# EAGLE board eTapper1main27 (EAGLE 8.3.2)
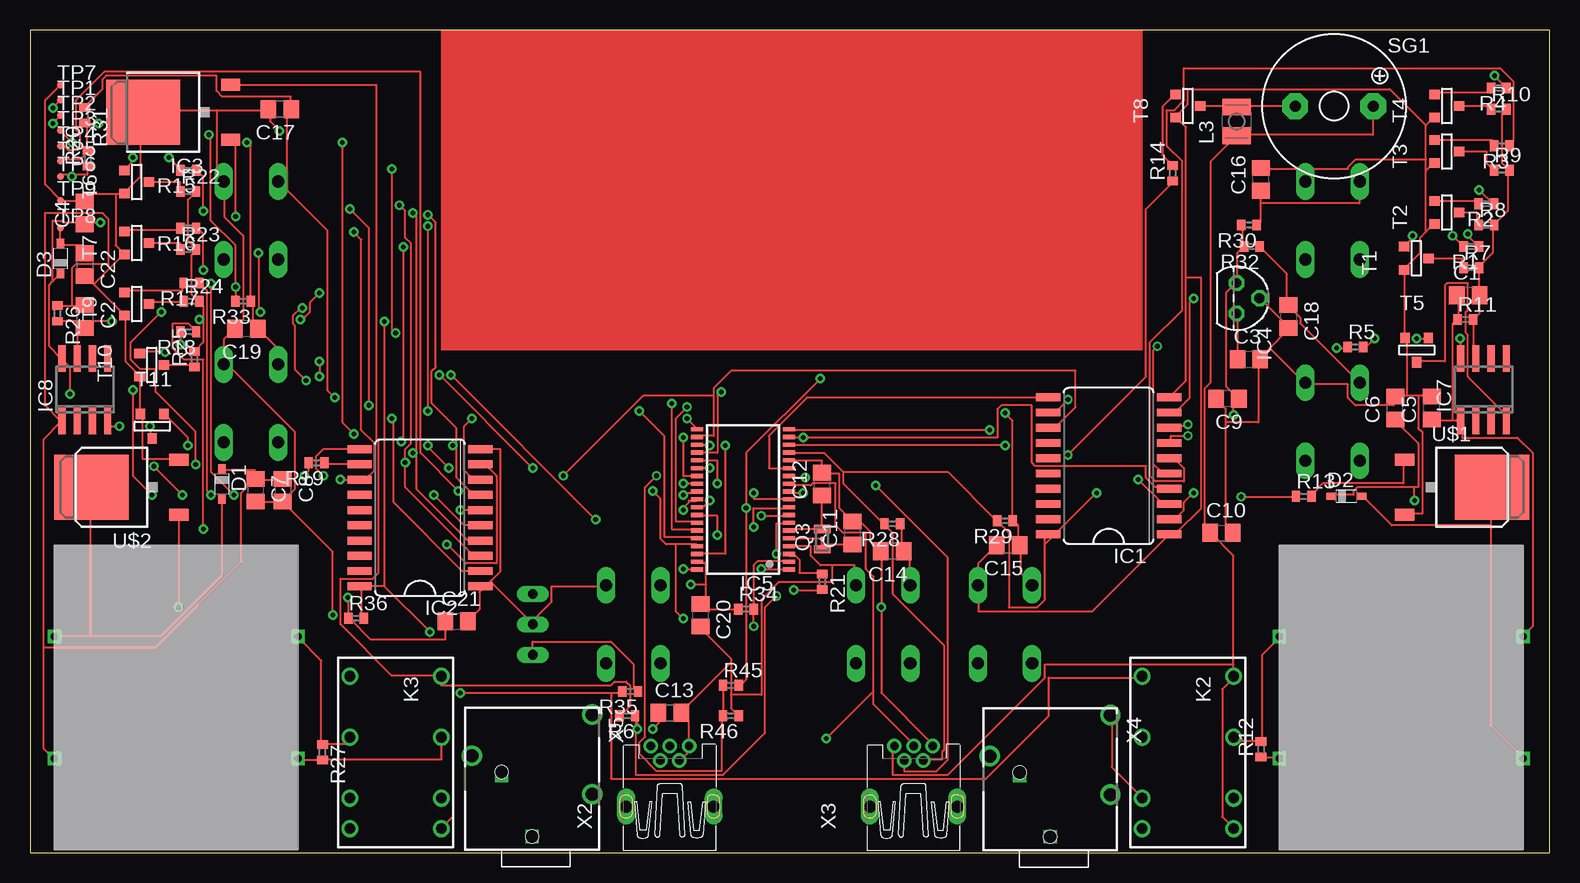
[diagram p0: board, top side]
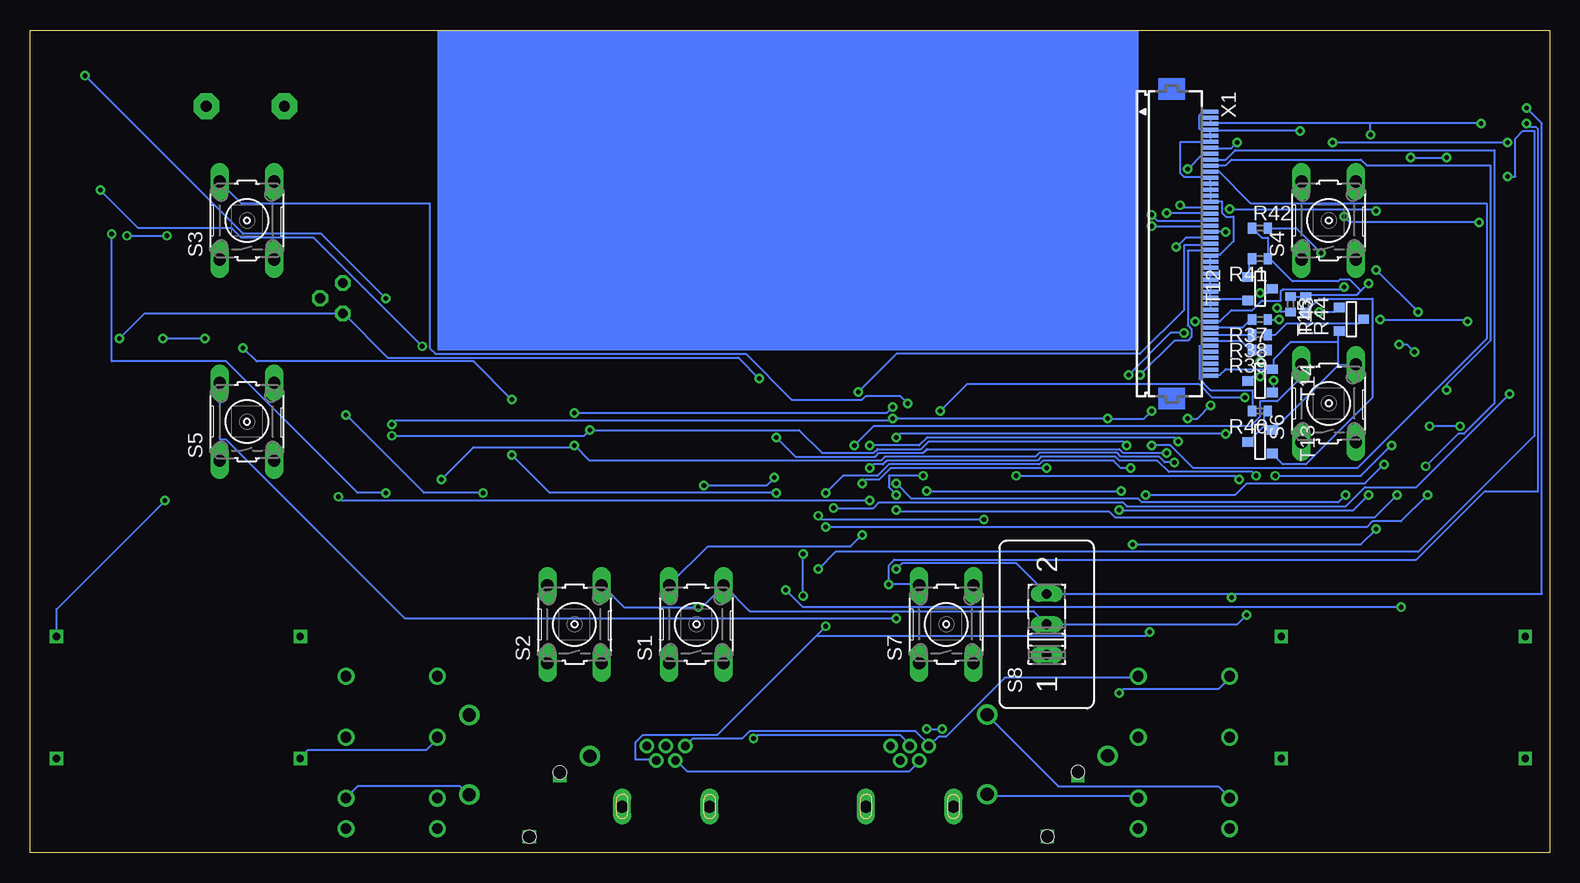
[diagram p1: board, bottom side, seen from below]

Size 126.67 x 68.57 mm. Coordinates in mm from the lower left corner, seen from the top.
Outline: 0,0 126.67,0 126.67,68.57 0,68.57 0,0
Copper layers (1*16): Top 0.035mm / dielectric 1.5mm / Bottom 0.035mm
Design rules "default *": minimum track width 6mil, minimum drill 15mil, track to track 6mil, track to pad 6mil, pad to pad 6mil, via to via 6mil, smd to smd 6mil, copper to edge 10mil, drill to drill 10mil, minimum pad ring 10mil, minimum via ring 8mil, stop-mask expansion 4mil, vias tented up to drill 0mil, thermal gap 15mil

## Footprints (pad centres in the part's own frame; a part is rotated, then mirrored left to right if it is on the bottom)
C0805 = smd 1.3 x 1.5: 1 -0.95,0; 2 0.95,0
SOD323_ST = smd 0.8 x 0.6: A 1.25,0; C -1.25,0
SO20W = smd 0.66 x 2.032: 1 -5.715,-5.029; 2 -4.445,-5.029; 3 -3.175,-5.029; 4 -1.905,-5.029; 5 -0.635,-5.029; 6 0.635,-5.029; 7 1.905,-5.029; 8 3.175,-5.029; 9 4.445,-5.029; 10 5.715,-5.029; 11 5.715,5.029; 12 4.445,5.029; 13 3.175,5.029; 14 1.905,5.029; 15 0.635,5.029; 16 -0.635,5.029; 17 -1.905,5.029; 18 -3.175,5.029; 19 -4.445,5.029; 20 -5.715,5.029
TO252 = smd 1 x 1.6: 1 -2.28,-4.8; 3 2.28,-4.8 | smd 5.4 x 6.2: 2 0,2.5
TO92 = drill 0.813 pad 1.27 octagon: 1 -1.27,0; 2 0,1.905; 3 1.27,0
TSSOP38_R-PDSO-G38-DA = smd 0.35 x 1: 1 -5.85,-3.85; 2 -5.2,-3.85; 3 -4.55,-3.85; 4 -3.9,-3.85; 5 -3.25,-3.85; 6 -2.6,-3.85; 7 -1.95,-3.85; 8 -1.3,-3.85; 9 -0.65,-3.85; 10 0,-3.85; 11 0.65,-3.85; 12 1.3,-3.85; 13 1.95,-3.85; 14 2.6,-3.85; 15 3.25,-3.85; 16 3.9,-3.85; 17 4.55,-3.85; 18 5.2,-3.85; 19 5.85,-3.85; 20 5.85,3.85; 21 5.2,3.85; 22 4.55,3.85; 23 3.9,3.85; 24 3.25,3.85; 25 2.6,3.85; 26 1.95,3.85; 27 1.3,3.85; 28 0.65,3.85; 29 0,3.85; 30 -0.65,3.85; 31 -1.3,3.85; 32 -1.95,3.85; 33 -2.6,3.85; 34 -3.25,3.85; 35 -3.9,3.85; 36 -4.55,3.85; 37 -5.2,3.85; 38 -5.85,3.85
SO08 = smd 0.6 x 2.2: 1 -1.905,-2.6; 2 -0.635,-2.6; 3 0.635,-2.6; 4 1.905,-2.6; 5 1.905,2.6; 6 0.635,2.6; 7 -0.635,2.6; 8 -1.905,2.6
DF2 = drill 0.9: 1 -6.35,-3.81; 3 -1.27,-3.81; 5 3.81,-3.81; 6 6.35,-3.81; 7 6.35,3.81; 8 3.81,3.81; 10 -1.27,3.81; 12 -6.35,3.81
L2825P = smd 1.4 x 2.4: 1 -1.2,0; 2 1.2,0
FC-12M = smd 0.7 x 1.4: 1 -0.85,0; 2 0.85,0
R0402 = smd 0.7 x 0.9: 1 -0.65,0; 2 0.65,0
B3F-10XX = drill 1.016 long: 1 -3.251,2.261; 2 3.251,2.261; 3 -3.251,-2.261; 4 3.251,-2.261
M251 = drill 0.813 long: 1 -2.54,0; 2 0,0; 3 2.54,0
F/QMBIII = drill 0.914 pad 2.159 octagon: + 3.251,0; - -3.251,0
SOT-23 = smd 0.787 x 0.889: 1 0.025,-1.016; 2 -0.94,1.016; 3 0.991,1.016
TP06R = smd 0.6 x 0.6: TP 0,0
D-PAK_TO252AA = smd 1 x 1.6: 1 -2.28,-4.8; 3 2.28,-4.8 | smd 5.4 x 6.2: 4 0,2.5
XFMR = drill 0.6 square: P$1 -10.16,5.08; P$2 -10.16,-5.08; P$3 10.16,5.08; P$4 10.16,-5.08
FH12-45S-0.5SH = smd 0.3 x 1.3: 1 -13,3.25; 2 -12.5,3.25; 3 -12,3.25; 4 -11.5,3.25; 5 -11,3.25; 6 -10.5,3.25; 7 -10,3.25; 8 -9.5,3.25; 9 -9,3.25; 10 -8.5,3.25; 11 -8,3.25; 12 -7.5,3.25; 13 -7,3.25; 14 -6.5,3.25; 15 -6,3.25; 16 -5.5,3.25; 17 -5,3.25; 18 -4.5,3.25; 19 -4,3.25; 20 -3.5,3.25; 21 -3,3.25; 22 -2.5,3.25; 23 -2,3.25; 24 -1.5,3.25; 25 -1,3.25; 26 -0.5,3.25; 27 0,3.25; 28 0.5,3.25; 29 1,3.25; 30 1.5,3.25; 31 2,3.25; 32 2.5,3.25; 33 3,3.25; 34 3.5,3.25; 35 4,3.25; 36 4.5,3.25; 37 5,3.25; 38 5.5,3.25; 39 6,3.25; 40 6.5,3.25; 41 7,3.25; 42 7.5,3.25; 43 8,3.25; 44 8.5,3.25; 45 9,3.25
32005-601 = drill 0.7 pad 1.016: 1 2.825,1.6; 2 1.625,0.8; 3 2.825,0; 4 1.625,-0.8; 5 2.825,-1.6 | drill 1 pad 1.422 long: M1 -2.225,3.65; M2 -2.225,-3.65
1501_04 = drill 1.1 pad 1.7: 1 -4.39,1.57; 2 5.66,-1.635; 3 -4.39,-5.065 | drill 0.6 square: P$1 0.635,5.08; P$2 3.175,0 | hole 1.1: 0.635,5.08; 3.175,-0.285

## Placement (x,y rotation side)
C1  .01uF  [C0805]  119.89,46.48 0 top
C2  .01uF  [C0805]  4.57,44.7 270 top
C3  [C0805]  101.6,41.15 0 top
C4  [C0805]  4.57,53.34 90 top
C5  3.3uF  [C0805]  116.84,37.08 90 top
C6  220uF  [C0805]  113.79,37.08 90 top
C7  220uF  [C0805]  18.8,30.23 270 top
C8  3.3uF  [C0805]  21.08,30.23 270 top
C9  47uF  [C0805]  99.82,37.85 180 top
C10  47uF  [C0805]  99.31,26.67 0 top
C11  12pF  [C0805]  68.58,26.67 90 top
C12  12pF  [C0805]  66.04,30.73 90 top
C13  1 uF  [C0805]  53.34,11.68 0 top
C14  .1uF  [C0805]  71.88,25.15 180 top
C15  .1uF  [C0805]  81.53,25.65 180 top
C16  .1uF  [C0805]  102.62,56.13 90 top
C17  .1uF  [C0805]  20.83,61.98 180 top
C18  .1uF  [C0805]  104.9,44.7 270 top
C19  .1uF  [C0805]  18.03,43.69 180 top
C20  .1uF  [C0805]  55.88,19.81 270 top
C21  .1uF  [C0805]  35.56,19.3 0 top
C22  220uF  [C0805]  4.57,49.02 270 top
D1  BAT60J  [SOD323_ST]  16,30.73 270 top
D2  BAT60J  [SOD323_ST]  109.73,29.72 0 top
D3  BAT60J  [SOD323_ST]  2.54,49.53 90 top
IC1  74AC373DW  [SO20W]  89.92,32.26 90 top
IC2  74AC373DW  [SO20W]  32.51,27.94 90 top
IC3  LM2936DT-5.0  [TO252]  11.94,61.72 90 top
IC4  LM2936Z-3.0  [TO92]  100.58,46.23 270 top
IC5  MSP430F2232IDA  [TSSOP38_R-PDSO-G38-DA]  59.44,29.46 90 top
IC7  LP2951M  [SO08]  121.16,38.61 0 top
IC8  LP2951M  [SO08]  4.57,38.61 0 top
K2  DF2-DC3V  [DF2]  96.52,8.38 270 top
K3  DF2-DC3V  [DF2]  30.48,8.38 270 top
L3  470uH  [L2825P]  100.58,60.96 90 top
Q3  FC-12M  [FC-12M]  66.04,26.16 90 top
R1  47K  [R0402]  120.14,50.55 180 top
R2  47K  [R0402]  121.41,54.1 180 top
R3  47K  [R0402]  122.68,58.93 180 top
R4  [R0402]  122.43,63.75 180 top
R5  47K  [R0402]  110.49,42.16 0 top
R6  47K  [R0402]  49.78,11.43 180 top
R7  1K  [R0402]  120.14,48.77 0 top
R8  3K  [R0402]  121.41,52.32 0 top
R9  6K  [R0402]  122.68,56.9 0 top
R10  12K  [R0402]  122.43,61.98 0 top
R11  3K  [R0402]  119.63,44.45 0 top
R12  51K  [R0402]  102.62,8.64 90 top
R13  1K  [R0402]  106.17,29.72 0 top
R14  1K  [R0402]  95.25,56.64 90 top
R15  47K  [R0402]  13.21,56.9 180 top
R16  47K  [R0402]  13.21,52.07 180 top
R17  47K  [R0402]  13.46,47.5 180 top
R18  47K  [R0402]  13.21,43.43 180 top
R19  47K  [R0402]  23.88,32.51 180 top
R20  47K  [R0402]  4.83,57.91 90 top
R21  1K  [R0402]  66.04,22.61 270 top
R22  1K  [R0402]  13.21,55.12 0 top
R23  3K  [R0402]  13.21,50.29 0 top
R24  6K  [R0402]  13.46,45.97 0 top
R25  12K  [R0402]  13.72,41.15 90 top
R26  3K  [R0402]  2.29,44.96 270 top
R27  51K  [R0402]  24.38,8.38 270 top
R28  47K  [R0402]  71.88,27.43 180 top
R29  47K  [R0402]  81.28,27.69 180 top
R30  47K  [R0402]  101.6,52.32 180 top
R31  47K  [R0402]  4.57,61.47 270 top
R32  47K  [R0402]  101.85,50.55 180 top
R33  47K  [R0402]  17.78,45.97 180 top
R34  47K  [R0402]  59.69,20.32 0 top
R35  100  [R0402]  50.04,13.46 180 top
R36  47K  [R0402]  27.18,19.56 0 top
R37  100  [R0402]  24.13,44.45 180 bottom
R38  100  [R0402]  24.13,43.18 180 bottom
R39  100  [R0402]  24.13,41.91 180 bottom
R40  100  [R0402]  24.13,36.83 180 bottom
R41  47K  [R0402]  24.13,49.53 180 bottom
R42  47K  [R0402]  24.13,52.07 0 bottom
R43  47K  [R0402]  21.59,45.72 270 bottom
R44  47K  [R0402]  20.32,45.72 270 bottom
R45  47K  [R0402]  58.42,13.97 0 top
R46  10K  [R0402]  58.42,11.43 180 top
S1  [B3F-10XX]  71.12,19.05 90 bottom
S2  [B3F-10XX]  81.28,19.05 90 bottom
S3  [B3F-10XX]  108.58,52.7 90 bottom
S4  [B3F-10XX]  18.41,52.7 90 bottom
S5  [B3F-10XX]  108.58,35.94 90 bottom
S6  [B3F-10XX]  18.41,37.47 90 bottom
S7  [B3F-10XX]  50.29,19.05 90 bottom
S8  [M251]  41.91,19.05 90 bottom
SG1  F/QMBIII  [F/QMBIII]  108.71,62.23 0 top
T1  2N3904  [SOT-23]  115.57,49.53 90 top
T2  2N3904  [SOT-23]  118.11,53.34 90 top
T3  2N3904  [SOT-23]  118.11,58.42 90 top
T4  2N3904  [SOT-23]  118.11,62.23 90 top
T5  2N3904  [SOT-23]  115.57,41.91 0 top
T6  2N3904  [SOT-23]  8.89,55.88 90 top
T7  2N3904  [SOT-23]  8.89,50.8 90 top
T8  2N3904  [SOT-23]  96.52,62.23 90 top
T9  2N3904  [SOT-23]  8.89,45.72 90 top
T10  2N3904  [SOT-23]  10.16,40.64 90 top
T11  2N3904  [SOT-23]  10.16,35.56 0 top
T12  2N3904  [SOT-23]  24.13,46.99 90 bottom
T13  2N3904  [SOT-23]  24.13,34.29 270 bottom
T14  2N3904  [SOT-23]  24.13,39.37 270 bottom
T15  2N3904  [SOT-23]  16.51,44.45 90 bottom
TP1  TPSTP06R  [TP06R]  2.54,62.74 0 top
TP2  TPSTP06R  [TP06R]  2.54,61.47 0 top
TP3  TPSTP06R  [TP06R]  2.54,60.2 0 top
TP4  TPSTP06R  [TP06R]  2.54,58.93 0 top
TP5  TPSTP06R  [TP06R]  2.54,57.66 0 top
TP6  TPSTP06R  [TP06R]  2.54,56.39 0 top
TP7  TPSTP06R  [TP06R]  2.54,64.01 0 top
TP8  TPSTP06R  [TP06R]  2.54,52.07 0 top
TP9  TPSTP06R  [TP06R]  2.54,54.36 0 top
U$1  IRLR024N  [D-PAK_TO252AA]  119.38,30.48 270 top
U$2  IRLR024N  [D-PAK_TO252AA]  7.62,30.48 90 top
U$3  XFMR  [XFMR]  114.3,12.95 180 top
U$4  XFMR  [XFMR]  12.19,12.95 0 top
X1  FH12-45S-0.5SH  [FH12-45S-0.5SH]  31.5,48.77 270 bottom
X2  MINI-USB_SHIELD5P2-32005-601  [32005-601]  53.34,6.1 90 top
X3  MINI-USB_SHIELD5P2-32005-601  [32005-601]  73.66,6.1 90 top
X4  1501_04  [1501_04]  85.67,6.43 180 top
X5  1501_04  [1501_04]  42.49,6.46 180 top

## Library data of the parts
C1-C22 L3 = rcl
D1-D3 = diode
IC1 IC2 = 74xx-eu
IC3 = national-semiconductor; MF: NATIONAL SEMICONDUCTOR; MPN: LM2936DT-5.0/NOPB; OC_FARNELL: 1286864; OC_NEWARK: 41K4501
IC4 = national-semiconductor; MF: NATIONAL SEMICONDUCTOR; MPN: LM2936Z-3.0/NOPB; OC_FARNELL: 1312709; OC_NEWARK: 41K4531
IC5 = texas; MPN: MSP430F2232IDA; OC_FARNELL: 1610178; OC_NEWARK: 28M6312
IC7 IC8 = national-semiconductor; MF: FAIRCHILD SEMICONDUCTOR; MPN: LP2951CM; OC_FARNELL: 9488561; OC_NEWARK: 78K6014
K2 K3 = relay; OC_FARNELL: unknown; OC_NEWARK: unknown
Q3 = crystal
R1-R46 = resistor
S1-S7 = switch-omron; MPN: B3F-1000; OC_FARNELL: 176432; OC_NEWARK: 36M3542
S8 = switch
SG1 = buzzer; OC_FARNELL: unknown; OC_NEWARK: unknown
T1-T15 = zetex; MPN: DSS20201L-7; OC_FARNELL: 1710688; OC_NEWARK: 25R4555
TP1-TP9 = testpad
U$1 U$2 = IRLR024N
U$3 U$4 = XFMR
X1 = con-hirose; OC_FARNELL: unknown; OC_NEWARK: unknown
X2 X3 = con-cypressindustries; OC_FARNELL: unknown; OC_NEWARK: unknown
X4 X5 = 1501_04

## Nets
+3V: C9.1 IC1.20 IC2.20 IC4.1 IC5.2 IC5.16 R20.2 R28.2 R29.2 R30.2 R31.2 R32.2 R33.2 R34.2 R36.2 TP5.TP X1.2 X1.3 X1.36 X3.4
+9V: C3.1 C4.1 D3.C IC3.1 IC4.3 IC7.8 IC8.8 R45.2
/LCS: IC5.8 X1.8
/RST: C13.1 IC5.7 R6.1
BAT+: C22.1 D3.A TP8.TP
GND: C3.2 C4.2 C5.2 C6.2 C7.2 C8.2 C9.2 C10.2 C11.2 C12.2 C13.2 C14.2 C15.2 C16.2 C17.2 C18.2 C19.2 C20.2 C21.2 C22.2 IC1.1 IC1.10 IC2.1 IC2.10 IC3.2 IC4.2 IC5.4 IC5.15 R46.1 S1.4 S2.4 S3.4 S4.4 S5.4 S6.4 S7.4 S8.2 T1.2 T2.2 T3.2 T4.2 T5.2 T6.2 T7.2 T8.2 T9.2 T10.2 T11.2 T12.2 T13.2 T14.2 T15.2 TP7.TP TP9.TP U$1.3 U$2.3 X1.1 X1.4 X1.5 X1.6 X1.12 X1.13 X1.14 X1.15 X1.16 X1.25 X1.26 X1.27 X1.28 X1.29 X1.30 X1.31 X1.32 X1.33 X1.34 X1.45 X2.4 X2.5 X3.5
IO1_0: C14.1 IC5.31 R28.1 S1.2
IO1_1: C15.1 IC5.32 R29.1 S2.2
IO1_2: C16.1 IC5.33 R30.1 S3.2
IO1_3: C17.1 IC5.34 R31.1 S4.2
IO4_0: IC1.3 IC2.3 IC5.17 X1.17
IO4_1: IC1.4 IC2.4 IC5.18 X1.18
IO4_2: IC1.7 IC2.7 IC5.19 X1.19
IO4_3: IC1.8 IC2.8 IC5.20 X1.20
IO4_4: IC1.13 IC2.13 IC5.21 X1.21
IO4_5: IC5.22 X1.22
IO4_6: IC5.23 X1.23
IO4_7: IC5.24 X1.24
J2_1: K2.3 R12.1 U$3.P$3
J2_3: K2.10 R12.2 U$3.P$4
J3_1: K3.3 R27.1 U$4.P$3
J3_3: K3.10 R27.2 U$4.P$4
LD_/C: IC5.29 X1.9
LEDK1: R37.2 X1.37
LEDK2: R38.2 X1.38
LEDK3: R39.2 X1.39
LEDK4: R40.2 X1.40
LHVTRIG: IC5.30 R13.1
LLED: IC5.27 R41.1 R42.1 R43.1 R44.1
LNC1: X1.41
LNC2: X1.42
LNC3: X1.43
LNC4: X1.44
LRD: IC5.10 X1.11
LRESET: IC5.26 X1.7
LSDO: X1.35
LTS+: K2.8 X4.1
LTS-: K2.5 X4.3
LVSEL: IC1.11 IC5.14
LWR: IC5.9 X1.10
N$1: IC1.2 R1.1
N$2: IC1.5 R2.1
N$3: IC1.6 R3.1
N$4: IC1.9 R4.1
N$5: IC1.12 R5.1
N$6: L3.2 SG1.- T8.1
N$7: R4.2 T4.3
N$8: R5.2 T5.3
N$9: D2.A U$1.4 U$3.P$1
N$10: R7.1 T1.1
N$11: R8.1 T2.1
N$12: R9.1 T3.1
N$13: R1.2 T1.3
N$14: R2.2 T2.3
N$15: R3.2 T3.3
N$16: R10.1 T4.1
N$17: C1.2 IC7.7 R7.2 R8.2 R9.2 R10.2 R11.2
N$18: C1.1 C5.1 C6.1 D2.C IC7.1 R11.1 U$3.P$2
N$19: D1.A U$2.4 U$4.P$1
N$20: IC2.2 R15.1
N$21: R13.2 U$1.1
N$22: R14.2 T8.3
N$23: R35.1 S8.1
N$24: IC2.5 R16.1
N$25: IC2.6 R17.1
N$26: IC2.9 R18.1
N$27: IC2.12 R19.1
N$28: R44.2 T13.3
N$29: R15.2 T6.3
N$30: R16.2 T7.3
N$31: R17.2 T9.3
N$32: R18.2 T10.3
N$33: R19.2 T11.3
N$34: K2.1 K3.1 R35.2
N$35: R22.1 T6.1
N$36: R23.1 T7.1
N$37: R24.1 T9.1
N$38: R25.1 T10.1
N$39: C2.2 IC8.7 R22.2 R23.2 R24.2 R25.2 R26.2
N$40: C2.1 C7.1 C8.1 D1.C IC8.1 R26.1 U$4.P$2
N$41: R37.1 T12.1
N$42: R21.2 U$2.1
N$43: R38.1 T15.1
N$44: R39.1 T14.1
N$45: IC7.4 T5.1
N$46: R40.1 T13.1
N$47: IC8.4 T11.1
N$48: R43.2 T14.3
N$49: R41.2 T12.3
N$50: R42.2 T15.3
RHVTRIG: IC5.3 R21.1
RTS+: K3.8 X5.1
RTS-: K3.5 X5.3
RVSEL: IC2.11 IC5.25
SCL: IC5.13 X2.2 X3.2
SDA: IC5.12 X2.3 X3.3
SPKR: IC5.11 R14.1
TCK: C18.1 IC5.35 R32.1 S5.2 TP4.TP
TDI: C20.1 IC5.37 R34.1 S7.2 TP2.TP
TDO: C21.1 IC5.38 R36.1 S8.3 TP1.TP
TEST: IC5.1 R20.1 TP6.TP
TMS: C19.1 IC5.36 R33.1 S6.2 TP3.TP
VBAT: IC5.28 R45.1 R46.2
VCC: C10.1 IC3.3 K2.7 K2.12 K3.7 K3.12 L3.1 R6.2 SG1.+ X2.1 X3.1
XIN: C12.1 IC5.6 Q3.2
XOUT: C11.1 IC5.5 Q3.1

## Tracks (layer width: path | path; a pad name or v marks a point on that pad's centre or on a via)
+3V  (via drill 0.38)
  Top 0.152: TP5.TP 2.54,57.78 4.13,57.78 4.76,58.42 R20.2 4.76,58.58 4.76,60.64 4.6,60.8 | 4.6,60.8 v5.71,60.8 | 4.6,60.8 R31.2 | 27.62,22.23 27.62,19.84 27.78,19.68 R36.2 | R33.2 17.14,46.04 v17.14,47.15 17.14,50.64 15.08,52.7 15.08,59.69 v14.92,59.85 | 29.53,22.23 27.62,22.23 | v29.53,44.29 29.53,22.23 | 27.62,22.23 IC2.20 | R30.2 100.97,52.23 101.12,52.07 101.12,50.64 R32.2 101.12,50.48 100.65,50.01 100.65,47.62 IC4.1 100.49,47.47 99.69,46.67 99.69,38.89 100.65,37.94 C9.1 100.65,37.78 100.33,37.47 v100.33,36.51 | 60.33,20.32 60.33,23.97 60.64,24.29 63.18,24.29 IC5.2 | 67.79,31.75 67.79,30.8 71.12,27.46 R28.2 71.28,27.3 71.91,26.67 71.91,21.59 76.2,17.3 76.2,8.57 76.04,8.41 76.04,7.78 74.61,7.78 X3.4 | 67.79,31.75 66.2,33.34 63.34,33.34 IC5.16 | 67.79,31.75 76.52,31.75 80.49,27.78 R29.2 80.64,27.62 81.6,26.67 81.6,20.48 83.98,20.48 84.61,21.11 84.61,25.72 | 84.61,25.72 84.61,26.35 84.77,26.51 IC1.20 | v60.33,18.89 60.33,20.32 | 60.33,20.32 R34.2 | 84.61,25.72 v88.9,30 | v33.34,18.41 29.53,22.23
  Bottom 0.152: X1.2 28.26,61.12 28.26,60.8 X1.3 28.1,60.8 14.92,60.8 | v5.71,60.8 14.92,60.8 | v17.14,47.15 17.3,46.99 22.23,46.99 22.38,46.83 22.38,46.04 23.97,46.04 24.77,45.24 26.51,45.24 27.46,44.29 28.1,44.29 X1.36 28.26,44.29 v29.53,44.29 | v14.92,59.85 14.92,60.8 | 61.12,18.1 69.37,9.84 75.56,9.84 76.2,9.21 76.2,7.78 74.61,7.78 X3.4 | 61.12,18.1 v60.33,18.89 | v100.33,36.51 93.82,30 v88.9,30 | v33.34,18.41 33.66,18.1 61.12,18.1
+9V  (via drill 0.38)
  Top 0.152: 1.91,47.62 1.59,47.31 1.59,42.23 2.54,41.27 IC8.8 2.7,41.12 3.33,40.48 v3.33,38.26 | 1.91,47.62 2.54,48.26 D3.C | 1.91,47.62 1.91,52.7 2.7,52.7 2.86,52.55 4.45,52.55 C4.1 4.6,52.55 v5.87,52.55 | v17.14,53.02 17.14,59.05 16.83,59.37 IC3.1 | v65.88,39.53 59.69,33.34 v59.69,28.73 59.69,14.45 59.21,13.97 R45.2 | C3.1 100.65,41.27 100.65,44.93 IC4.3 | v119.22,42.86 119.22,41.27 IC7.8
  Bottom 0.152: v17.14,53.02 16.67,52.55 v5.87,52.55 | v65.88,39.53 67.63,41.27 96.84,41.27 100.49,44.93 IC4.3 100.65,44.93 117.16,44.93 v119.22,42.86 | v3.33,38.26 11.11,30.48 15.4,30.48 16.99,28.89 35.24,28.89 35.56,29.21 55.88,29.21 56.36,28.73 v59.69,28.73
/LCS  (via drill 0.38)
  Top 0.152: v60.96,28.1 63.18,28.1 IC5.8 | v35.08,39.85 v47.15,27.78 | v30.48,43.34 30.16,43.66 v30.16,56.99
  Bottom 0.152: v60.96,28.1 60.64,27.78 v47.15,27.78 | v35.08,39.85 31.59,43.34 v30.48,43.34 | v30.16,56.99 28.89,58.26 X1.8
/RST  (via drill 0.38)
  Top 0.152: 50.48,11.43 50.64,11.27 v50.64,10.32 | v51.91,10.32 52.39,10.79 52.39,11.59 C13.1 | v62.23,24.92 62.23,27.46 63.18,27.46 IC5.7 | v62.23,21.43 61.28,20.48 61.28,10 57.78,6.51 50.48,6.51 50.48,11.43 | 50.48,11.43 R6.1
  Bottom 0.152: v51.91,10.32 v50.64,10.32 | v62.23,21.43 v62.23,24.92
BAT+
  Top 0.152: TP8.TP D3.A 2.54,50.64 4.45,50.64 4.45,50.01 C22.1
GND  (via drill 0.38)
  Top 0.152: U$2.3 12.38,32.86 9.37,32.86 9.37,36.51 T11.2 9.21,36.67 9.21,39.69 T10.2 9.05,39.85 7.94,40.96 7.94,44.77 T9.2 7.78,44.93 5.4,47.31 | 5.4,47.31 4.6,48.1 C22.2 | 5.4,47.31 5.4,47.47 7.78,49.85 T7.2 7.78,50.01 7.14,50.64 7.14,54.93 | TP7.TP 2.54,63.98 1.27,62.71 1.27,55.72 2.54,54.45 TP9.TP 2.54,54.29 4.45,54.29 C4.2 4.6,54.29 4.6,54.93 7.14,54.93 | 7.14,54.93 7.78,54.93 T6.2 7.94,55.09 9.21,56.36 9.21,61.44 9.37,61.59 IC3.2 9.53,61.75 9.53,61.91 15.56,61.91 | C7.2 18.89,29.21 20.95,29.21 C8.2 | 16.19,40.96 16.19,40.8 S6.4 16.19,40.96 | 16.19,40.96 16.19,42.86 16.99,43.66 C19.2 17.14,43.81 17.78,44.45 17.78,51.44 16.19,53.02 16.19,55.88 S4.4 16.03,56.04 15.56,56.52 15.56,61.91 | 16.19,40.96 22.07,35.08 22.07,30.32 21.11,29.37 C8.2 | 15.56,61.91 19.84,61.91 C17.2 20,61.91 20,60.96 v20.8,60.17 | 99.69,35.88 99.69,27.15 100.17,26.67 C10.2 | 99.69,35.88 99.69,36.99 98.9,37.78 C9.2 | 103.35,42.07 104.78,43.5 104.78,43.66 C18.2 104.78,43.81 104.78,43.97 102.55,46.2 IC4.2 | 103.35,42.07 102.55,41.27 C3.2 102.39,41.12 102.39,35.88 99.69,35.88 | 103.35,42.07 106.2,39.21 S5.4 106.36,39.05 109.86,39.05 109.86,37.94 110.49,37.31 113.67,37.31 113.67,37.94 C6.2 113.82,38.1 114.78,38.1 | 115.73,38.1 116.84,38.1 C5.2 | 115.73,38.1 114.78,38.1 | 115.73,38.1 115.73,35.4 116.05,35.08 116.05,28.26 114.62,28.26 U$1.3 | 106.2,56.99 102.71,56.99 C16.2 | 106.2,56.99 106.2,56.04 S3.4 106.2,56.99 | 116.36,51.75 115.89,51.28 115.89,50.01 114.62,48.74 T1.2 114.62,48.58 114.62,43.02 T5.2 114.78,42.86 114.78,38.1 | 116.36,51.75 117,52.39 T2.2 | 116.36,56.83 117,57.47 T3.2
  Top 0.152: 116.36,51.75 116.36,56.83 | 116.36,60.64 117,61.28 T4.2 | 116.36,56.83 116.36,57.78 | 116.36,57.78 116.36,60.64 | 106.2,56.99 109.86,56.99 109.86,57.15 110.49,57.78 116.36,57.78 | IC5.15 63.34,32.7 66.04,32.7 C12.2 66.04,31.59 67.47,31.59 67.47,28.73 C11.2 68.58,27.46 69.37,27.46 70.01,26.83 70.01,26.04 70.8,25.24 C14.2 70.96,25.08 v70.96,20.48 70.96,13.34 75.25,9.05 X3.5 | 37.47,21.75 37.47,22.23 IC2.1 | 37.47,21.75 37.47,20.32 36.51,19.37 C21.2 | IC2.10 39.21,33.66 39.21,23.5 38.42,22.7 | 37.47,21.75 38.42,22.7 | 41.75,19.21 38.42,22.54 38.42,22.7 | 41.75,19.21 43.5,20.95 43.5,22.23 47.94,22.23 S7.4 | 41.75,19.21 S8.2 | 96.36,47.94 96.36,39.37 95.09,38.1 IC1.10 | 96.36,47.94 96.36,60.48 95.57,61.28 T8.2 95.57,61.44 96.52,62.39 96.52,63.66 113.35,63.66 116.36,60.64 | X2.4 54.29,7.78 54.93,8.41 54.93,8.89 X2.5 54.93,9.05 54.93,10.95 54.29,11.59 C13.2 54.29,11.75 58.42,15.88 | 58.42,15.88 58.42,16.19 55.88,18.73 C20.2 | 58.42,15.88 58.42,13.18 | 58.42,13.18 58.42,12.06 59.05,11.43 R46.1 | 66.83,23.97 68.74,23.97 68.74,22.38 S1.4 | 66.83,23.97 65.88,23.97 65.09,24.77 65.09,25.56 63.34,25.56 IC5.4 | C15.2 80.49,25.56 79.06,24.13 79.06,22.38 S2.4 79.06,22.23 79.06,20.16 88.58,20.16 94.93,26.51 IC1.1 95.09,26.67 95.57,26.67 97.63,28.73 97.63,47.94 96.36,47.94 | 58.42,13.18 60.96,13.18 60.96,21.11 62.39,22.54 66.83,22.54 66.83,23.97 | v25.24,19.84 25.24,25.08 21.11,29.21 C8.2
  Bottom 0.152: X1.45 28.1,39.85 27.46,39.85 26.99,40.32 23.18,40.32 T14.2 23.02,40.32 23.02,41.12 21.59,42.55 17.62,42.55 | 17.62,40.64 23.02,35.24 T13.2 | 17.62,40.64 16.19,40.64 S6.4 | 17.62,40.64 17.62,42.55 | 17.62,42.55 17.62,43.5 T15.2 | X1.28 28.26,48.74 X1.27 28.26,48.9 28.26,49.21 X1.26 28.26,49.37 28.26,49.69 X1.25 28.1,49.85 27.46,49.85 26.35,50.96 26.35,53.02 26.99,53.02 27.3,53.34 27.3,54.29 28.1,54.29 X1.16 28.26,54.29 X1.15 | X1.34 28.26,45.4 28.26,45.72 X1.33 28.26,45.88 28.26,46.2 X1.32 | T12.2 25.24,46.2 28.1,46.2 X1.32 | X1.32 28.26,46.35 28.26,46.67 X1.31 28.26,46.83 28.26,47.15 X1.30 28.26,47.31 28.26,47.62 X1.29 28.26,47.78 X1.28 | X1.28 | X1.15 28.26,55.24 X1.14 28.26,55.4 28.26,55.72 X1.13 28.26,55.88 28.26,56.2 X1.12 28.26,56.36 30.48,56.36 30.8,56.67 30.8,59.21 28.26,59.21 X1.6 28.26,59.37 28.26,59.69 X1.5 28.26,59.85 28.26,60.17 X1.4 | X1.15 | X1.1 28.26,61.75 28.89,61.75 29.21,61.44 29.21,60.33 28.26,60.33 X1.4 | v20.8,60.17 28.1,60.17 X1.4 | S2.4 78.9,22.23 77.15,20.48 v70.96,20.48 70.64,20.48 68.9,22.23 S1.4 68.74,22.23 66.67,20.16 43.02,20.16 S8.2 26.04,19.05 v25.24,19.84
IO1_0  (via drill 0.38)
  Top 0.152: R28.1 72.55,27.3 72.71,27.15 72.71,25.24 C14.1 72.87,25.08 73.34,24.61 73.34,22.38 S1.2 | v57.31,26.51 57.31,28.1 55.72,28.1 IC5.31
  Bottom 0.152: v57.31,26.51 58.26,25.56 70.17,25.56 73.34,22.38 S1.2
IO1_1  (via drill 0.38)
  Top 0.152: v54.77,37.15 53.82,36.2 53.82,27.62 55.56,27.62 IC5.32 | v81.28,36.67 81.92,36.04 81.92,27.78 R29.1 82.07,27.62 82.39,27.3 82.39,25.72 C15.1 82.55,25.56 82.55,23.34 83.5,22.38 S2.2
  Bottom 0.152: v54.77,37.15 55.24,36.67 v81.28,36.67
IO1_2  (via drill 0.38)
  Top 0.152: 102.55,54.13 102.55,55.09 C16.1 | 102.55,54.13 102.55,52.55 102.39,52.39 R30.1 | v53.5,37.47 53.5,26.99 55.56,26.99 IC5.33 | 102.55,54.13 110.81,54.13 110.81,55.88 S3.2
  Bottom 0.152: v53.5,37.47 54.13,38.1 56.99,38.1 57.31,37.78 63.18,37.78 66.99,41.59 92.87,41.59 93.34,42.07 93.34,54.13 109.06,54.13 110.81,55.88 S3.2
IO1_3  (via drill 0.38)
  Top 0.152: R31.1 4.6,62.23 6.03,63.66 6.03,64.45 6.35,64.77 15.56,64.77 15.56,63.5 16.03,63.02 21.75,63.02 21.75,62.07 C17.1 21.75,61.91 21.43,61.59 21.43,55.24 | v50.8,36.83 52.86,34.77 52.86,26.35 55.56,26.35 IC5.34 | v25.4,37.94 24.77,38.58 24.77,51.91 21.43,55.24 | 21.43,55.24 20.8,55.88 S4.2 21.43,55.24
  Bottom 0.152: v50.8,36.83 48.58,39.05 29.21,39.05 28.1,37.94 v25.4,37.94
IO4_0  (via drill 0.38)
  Top 0.152: v81.28,33.97 63.34,33.97 IC5.17 | v92.39,31.11 94.3,29.21 94.93,29.21 IC1.3 | v30.8,53.98 31.27,53.5 31.27,51.28 31.75,50.8 31.75,34.13 31.27,33.66 v31.27,32.54 31.27,30.48 36.99,24.77 IC2.3
  Bottom 0.152: v92.39,31.11 89.69,33.81 81.44,33.81 v81.28,33.97 80.01,32.7 55.72,32.7 55.4,33.02 42.86,33.02 42.55,33.34 36.04,33.34 35.72,33.02 32.54,33.02 32.07,32.54 v31.27,32.54 | v30.8,53.98 30.64,53.82 28.26,53.82 X1.17
IO4_1  (via drill 0.38)
  Top 0.152: v31.91,53.34 32.23,53.02 32.23,33.34 | 32.23,33.34 32.23,30.32 36.51,26.04 IC2.4 | IC5.18 63.34,34.61 v64.45,34.61 80.64,34.61 80.64,36.99 80.96,37.31 83.5,37.31 83.5,32.54 83.82,32.23 93.03,32.23 93.03,31.27 93.82,30.48 94.93,30.48 IC1.4 | v31.91,33.34 32.23,33.34
  Bottom 0.152: v31.91,53.34 28.26,53.34 X1.18 | v31.91,33.34 35.56,33.34 35.88,33.66 51.91,33.66 52.23,33.34 55.88,33.34 56.2,33.02 62.87,33.02 v64.45,34.61
IO4_2  (via drill 0.38)
  Top 0.152: v33.18,53.18 33.81,52.55 33.81,40.48 33.5,40.16 33.5,37.47 35.56,35.4 35.56,33.97 | 35.56,33.97 35.56,31.27 36.99,29.84 IC2.7 | v80.01,35.24 63.34,35.24 IC5.19 | v96.52,34.77 95.09,34.77 95.09,34.29 IC1.7 | v35.24,33.97 35.56,33.97
  Bottom 0.152: v33.18,53.18 32.7,52.7 28.26,52.7 X1.19 | v96.52,34.77 80.49,34.77 v80.01,35.24 62.55,35.24 60.64,33.34 56.36,33.34 56.04,33.66 52.39,33.66 51.75,34.29 35.56,34.29 v35.24,33.97
IO4_3  (via drill 0.38)
  Top 0.152: v54.77,36.2 55.56,35.4 IC5.20 | v36.83,36.2 36.2,35.56 36.2,31.91 36.99,31.11 IC2.8 | v33.18,36.83 v33.18,52.23 | v96.52,35.72 96.52,35.56 95.09,35.56 IC1.8
  Bottom 0.152: v33.18,52.23 28.26,52.23 X1.20 | v33.18,36.83 33.81,36.2 v36.83,36.2 v54.77,36.2 54.93,36.04 96.2,36.04 v96.52,35.72
IO4_4  (via drill 0.38)
  Top 0.152: v26.99,51.75 27.62,51.12 27.62,35.24 28.73,34.13 28.73,31.91 27.94,31.11 IC2.13 v25.88,31.11 | 56.99,38.1 56.99,38.73 58.42,40.16 87.15,40.16 87.15,37.15 85.57,35.56 84.93,35.56 IC1.13 | 56.99,38.1 56.99,34.77 55.72,34.77 IC5.21 | v44.45,31.43 51.12,38.1 56.99,38.1
  Bottom 0.152: v26.99,51.75 28.1,51.75 X1.21 | v25.88,31.11 26.19,31.43 v44.45,31.43
IO4_5  (via drill 0.38)
  Top 0.152: v56.67,33.97 55.72,33.97 IC5.22 | v30.96,34.29 31.11,34.45 v31.11,50.48
  Bottom 0.152: v56.67,33.97 52.55,33.97 51.91,34.61 31.27,34.61 v30.96,34.29 | v31.11,50.48 30.32,51.28 X1.22
IO4_6  (via drill 0.38)
  Top 0.152: v57.63,38.42 57.31,38.1 57.31,33.34 55.72,33.34 IC5.23
  Bottom 0.152: v57.63,38.42 54.45,41.59 34.13,41.59 30.48,45.24 30.48,50.64 29.05,50.64 28.89,50.8 28.26,50.8 X1.23
IO4_7  (via drill 0.38)
  Top 0.152: v57.31,30.8 57.31,32.7 55.72,32.7 IC5.24 | v34.13,39.85 v41.91,32.07
  Bottom 0.152: v57.31,30.8 56.99,31.11 55.88,31.11 54.93,32.07 v41.91,32.07 | v34.13,39.85 31.27,42.7 30.16,42.7 29.84,43.02 29.84,43.66 30.16,43.97 30.16,50.16 28.26,50.16 X1.24
J2_1
  Top 0.152: R12.1 102.71,7.94 104.14,7.94 U$3.P$3
  Bottom 0.152: U$3.P$3 104.14,7.94 103.5,8.57 93.66,8.57 92.71,9.53 K2.3
J2_3
  Top 0.152: K2.10 100.33,9.37 102.55,9.37 R12.2 102.71,9.37 102.71,16.51 104.14,17.94 U$3.P$4
J3_1
  Top 0.152: K3.3 26.67,9.05 24.45,9.05 R27.1 24.29,9.05 24.29,16.03 22.38,17.94 U$4.P$3
J3_3
  Top 0.152: U$4.P$4 22.38,7.78 24.29,7.78 R27.2 24.45,7.78 34.29,7.78 K3.10
LD_/C  (via drill 0.38)
  Top 0.152: v54.45,28.57 54.45,28.73 54.93,29.21 54.93,29.37 55.56,29.37 IC5.29 | v10.32,32.23 v12.7,29.84
  Bottom 0.152: v54.45,28.57 54.29,28.42 36.67,28.42 36.2,27.94 14.61,27.94 v12.7,29.84 | v10.32,32.23 7.62,34.92 7.14,34.92 4.6,37.47 4.6,58.58 26.19,58.58 26.99,57.78 28.1,57.78 X1.9
LEDK1
  Bottom 0.152: R37.2 24.92,44.45 25.56,43.81 28.1,43.81 X1.37
LEDK2
  Bottom 0.152: R38.2 28.1,43.18 X1.38
LEDK3
  Bottom 0.152: R39.2 24.92,41.91 25.72,42.7 28.1,42.7 X1.39
LEDK4
  Bottom 0.152: R40.2 24.77,36.83 24.77,38.58 28.26,38.58 29.21,39.53 29.21,42.23 28.26,42.23 X1.40
LHVTRIG  (via drill 0.38)
  Top 0.152: v100.97,29.69 105.41,29.69 R13.1 | v56.67,29.37 56.2,28.89 55.72,28.89 IC5.30
  Bottom 0.152: v100.97,29.69 100.65,29.37 v56.67,29.37
LLED  (via drill 0.38)
  Top 0.152: v54.45,30.8 55.56,30.8 IC5.27 | v16.99,29.84 15.08,31.75 v15.08,47.47
  Bottom 0.152: R42.1 24.77,52.07 23.97,51.28 23.5,51.28 23.5,49.53 R41.1 23.34,49.53 21.43,47.62 17.62,47.62 17.46,47.78 16.67,47.78 15.72,46.83 | R43.1 21.59,46.35 20.32,46.35 R44.1 20.32,46.51 16.03,46.51 15.72,46.83 | v54.45,30.8 53.18,29.53 34.29,29.53 33.97,29.21 17.62,29.21 v16.99,29.84 | 15.72,46.83 v15.08,47.47
LRD  (via drill 0.38)
  Top 0.152: v60.33,30 60.33,29.53 63.18,29.53 IC5.10 | v34.92,32.07 33.18,33.81 v33.18,33.97
  Bottom 0.152: v60.33,30 58.9,31.43 56.04,31.43 55.09,32.38 42.55,32.38 42.23,32.7 36.35,32.7 35.72,32.07 v34.92,32.07 | v33.18,33.97 31.59,33.97 29.69,32.07 16.03,32.07 5.24,42.86 5.24,54.13 24.92,54.13 27.62,56.83 28.1,56.83 X1.11
LRESET  (via drill 0.38)
  Top 0.152: v54.45,34.61 54.45,31.43 55.56,31.43 IC5.26 | v26.99,34.92 26.04,35.88 v26.04,59.21
  Bottom 0.152: v54.45,34.61 54.13,34.92 v26.99,34.92 | v26.04,59.21 26.51,58.74 28.1,58.74 X1.7
LTS+
  Bottom 0.152: K2.8 100.33,4.6 99.38,5.56 90.81,5.56 90.17,4.92 X4.1
LTS-
  Top 0.152: K2.5 92.71,4.6 90.17,7.14 90.17,11.43 X4.3
LVSEL
  Top 0.152: IC5.14 63.18,32.07 61.59,32.07 61.59,34.77 64.77,37.94 84.77,37.94 IC1.11
LWR  (via drill 0.38)
  Top 0.152: v60.33,27.15 60.33,28.73 63.18,28.73 IC5.9 | v10.16,29.84 8.57,31.43 v8.57,38.58
  Bottom 0.152: v60.33,27.15 15.24,27.15 14.76,27.62 12.38,27.62 v10.16,29.84 | v8.57,38.58 8.57,39.05 4.92,42.7 4.92,57.31 15.24,57.31 15.72,57.78 26.51,57.78 26.99,57.31 28.1,57.31 X1.10
N$1  (via drill 0.38)
  Top 0.152: v119.86,51.59 119.86,51.44 120.65,50.64 R1.1 | v97,30 96.2,29.21 96.2,28.57 95.57,27.94 95.09,27.94 IC1.2
  Bottom 0.152: v119.86,51.59 119.86,40.96 110.33,40.96 99.38,30 v97,30
N$2  (via drill 0.38)
  Top 0.152: v120.81,55.24 121.92,54.13 R2.1 | v93.98,42.23 93.66,41.91 93.66,32.38 94.3,31.75 94.93,31.75 IC1.5
  Bottom 0.152: v120.81,55.24 117.63,52.07 109.86,52.07 109.06,51.28 103.03,51.28 v93.98,42.23
N$3
  Top 0.152: R3.1 123.35,59.05 123.67,59.37 123.67,64.29 122.56,65.41 96.2,65.41 96.2,62.71 95.41,61.91 94.77,61.91 94.77,58.9 96.04,57.63 96.04,45.24 93.34,42.55 93.34,31.43 93.82,30.96 96.2,30.96 96.2,32.07 95.41,32.86 95.09,32.86 IC1.6
N$4  (via drill 0.38)
  Top 0.152: v122.08,64.77 123.03,63.82 R4.1 | v97,46.2 96.68,45.88 96.68,37.94 95.57,36.83 95.09,36.83 IC1.9
  Bottom 0.152: v122.08,64.77 108.9,51.59 102.39,51.59 v97,46.2
N$5  (via drill 0.38)
  Top 0.152: v108.9,42.07 109.7,42.07 R5.1 | v86.52,37.78 85.57,36.83 84.93,36.83 IC1.12
  Bottom 0.152: v108.9,42.07 107.79,40.96 89.69,40.96 v86.52,37.78
N$6
  Top 0.152: T8.1 97.63,62.23 100.49,62.23 L3.2 100.65,62.23 SG1.-
N$7
  Top 0.152: T4.3 117.16,63.34 121.76,63.34 121.76,63.66 R4.2
N$8  (via drill 0.38)
  Top 0.152: v115.57,42.86 116.52,42.86 T5.3 | v112.08,42.86 111.28,42.07 R5.2
  Bottom 0.152: v112.08,42.86 v115.57,42.86
N$9
  Top 0.152: 121.76,27.3 113.51,27.3 111.12,29.69 D2.A | 121.76,27.3 121.76,30.48 U$1.4 | 121.76,27.3 121.76,10.64 124.46,7.94 U$3.P$1
N$10
  Top 0.152: T1.1 116.68,49.53 119.38,49.53 119.38,48.9 R7.1
N$11
  Top 0.152: T2.1 119.22,53.34 120.65,53.34 120.65,52.39 R8.1
N$12
  Top 0.152: T3.1 119.22,58.42 121.44,58.42 121.44,57.47 121.92,56.99 R9.1
N$13  (via drill 0.38)
  Top 0.152: v115.25,51.44 115.25,51.28 114.62,50.64 T1.3 | v118.59,51.44 119.38,50.64 R1.2
  Bottom 0.152: v118.59,51.44 v115.25,51.44
N$14
  Top 0.152: T2.3 117.16,54.29 120.65,54.29 120.65,54.13 R2.2
N$15
  Top 0.152: T3.3 117.16,59.37 121.92,59.37 121.92,59.05 R3.2
N$16
  Top 0.152: T4.1 119.22,62.23 121.76,62.23 121.76,62.07 R10.1
N$17
  Top 0.152: 120.33,44.45 120.81,44.93 120.81,46.35 C1.2 120.81,46.51 120.81,48.74 R7.2 120.81,48.9 121.92,50.01 121.92,52.23 R8.2 122.08,52.39 123.19,53.5 123.19,56.83 R9.2 123.19,56.99 122.71,57.47 122.71,61.59 123.03,61.91 R10.2 | 120.33,44.45 120.33,41.43 120.49,41.27 IC7.7 | 120.33,44.45 R11.2
N$18  (via drill 0.38)
  Top 0.152: 115.41,30.48 115.73,30.48 115.73,34.13 113.82,36.04 C6.1 | 115.41,30.48 110.65,30.48 110.33,30.16 110.33,29.84 108.58,29.84 D2.C | C1.1 119.06,46.35 119.06,44.45 R11.1 118.9,44.45 118.59,44.13 118.59,36.04 | 118.59,36.04 119.22,36.04 IC7.1 119.38,35.88 119.38,34.61 123.98,34.61 125.25,33.34 125.25,18.89 124.46,18.1 U$3.P$2 | 118.59,36.04 116.84,36.04 C5.1 | v115.41,29.37 115.41,30.48
  Bottom 0.152: v115.41,29.37 124.46,20.32 U$3.P$2
N$19
  Top 0.152: 5.08,18.1 2.06,18.1 U$4.P$1 | 5.08,18.1 10.95,18.1 16.03,23.18 16.03,29.37 D1.A | 5.08,18.1 5.08,30.48 U$2.4
N$20  (via drill 0.38)
  Top 0.152: v14.45,53.5 14.45,56.36 13.97,56.83 R15.1 | v26.67,53.66 28.26,52.07 v28.26,37.31 | v30.16,36.2 30.32,36.04 30.32,29.21 36.04,23.5 IC2.2
  Bottom 0.152: v14.45,53.5 14.61,53.66 v26.67,53.66 | v28.26,37.31 29.37,36.2 v30.16,36.2
N$21
  Top 0.152: R13.2 106.84,29.84 107.79,30.8 114.46,30.8 114.46,32.7 U$1.1
N$22
  Top 0.152: T8.3 95.41,63.18 94.46,62.23 94.46,58.1 95.25,57.31 R14.2
N$23
  Top 0.152: S8.1 41.91,17.62 48.42,17.62 50.32,15.72 50.32,13.81 50.64,13.49 R35.1
N$24  (via drill 0.38)
  Top 0.152: v14.45,48.58 14.45,51.59 13.97,52.07 R16.1 | v10.95,45.09 8.41,42.55 8.41,41.12 9.21,40.32 10.48,40.32 10.48,38.42 13.81,35.08 v13.81,32.38 | v33.66,29.84 36.2,27.3 IC2.5
  Bottom 0.152: v10.95,45.09 v14.45,48.58 | v13.81,32.38 15.4,30.8 25.24,30.8 26.19,29.84 v33.66,29.84
N$25  (via drill 0.38)
  Top 0.152: v15.08,29.84 14.76,30.16 14.76,46.83 14.13,47.47 R17.1 | IC2.6 v35.88,28.57
  Bottom 0.152: v15.08,29.84 16.35,28.57 v35.88,28.57
N$26  (via drill 0.38)
  Top 0.152: v14.45,26.99 14.45,41.12 12.86,41.12 11.91,42.07 11.91,44.13 13.18,44.13 13.81,43.5 R18.1 | v34.77,25.72 36.35,24.13 38.89,24.13 38.89,31.43 37.94,32.38 IC2.9
  Bottom 0.152: v14.45,26.99 15.72,25.72 v34.77,25.72
N$27
  Top 0.152: IC2.12 24.61,32.38 R19.1
N$28
  Bottom 0.152: T13.3 23.02,33.18 22.23,32.38 20.32,32.38 14.76,37.94 14.76,46.2 19.21,46.2 20.32,45.09 R44.2
N$29  (via drill 0.38)
  Top 0.152: v8.57,57.94 8.57,57.63 7.94,56.99 T6.3 | v11.59,57.94 12.54,56.99 R15.2
  Bottom 0.152: v11.59,57.94 v8.57,57.94
N$30
  Top 0.152: T7.3 7.94,51.91 12.54,51.91 12.54,52.07 R16.2
N$31
  Top 0.152: T9.3 7.94,46.83 12.7,46.83 12.7,47.47 R17.2
N$32  (via drill 0.38)
  Top 0.152: v11.27,41.75 9.21,41.75 T10.3 | v12.54,42.39 12.54,43.34 R18.2
  Bottom 0.152: v11.27,41.75 11.91,42.39 v12.54,42.39
N$33  (via drill 0.38)
  Top 0.152: v13.18,33.97 13.18,34.61 11.27,36.51 T11.3 | v22.86,31.43 23.18,31.75 23.18,32.38 R19.2
  Bottom 0.152: v13.18,33.97 15.72,31.43 v22.86,31.43
N$34  (via drill 0.38)
  Top 0.152: v35.88,13.34 48.42,13.34 | 48.42,13.34 49.37,13.34 R35.2 | 48.42,13.34 48.42,6.19 79.69,6.19 84.93,11.43 84.93,14.61 92.71,14.61 K2.1
  Bottom 0.152: v35.88,13.34 35.56,13.65 27.62,13.65 26.67,14.61 K3.1
N$35
  Top 0.152: T6.1 10,55.88 12.54,55.88 12.54,55.24 R22.1
N$36
  Top 0.152: T7.1 10,50.8 12.54,50.8 12.54,50.32 R23.1
N$37
  Top 0.152: T9.1 10,45.88 12.7,45.88 R24.1
N$38
  Top 0.152: T10.1 11.27,40.64 13.65,40.64 R25.1
N$39  (via drill 0.38)
  Top 0.152: 4.45,44.29 2.38,44.29 R26.2 | 4.45,44.29 4.45,43.81 C2.2 | C2.2 4.45,43.66 3.97,43.18 3.97,41.27 IC8.7 | 14.45,44.45 14.45,45.56 14.13,45.88 R24.2 13.97,46.04 13.49,46.51 13.49,49.85 13.81,50.16 R23.2 13.81,50.32 13.18,50.96 13.18,54.45 13.81,55.09 R22.2 | 14.45,44.45 14.45,42.55 13.81,41.91 R25.2 | v6.83,44.29 4.45,44.29 | 14.45,44.45 v14.13,44.45 | 4.45,44.29 C2.2
  Bottom 0.152: v6.83,44.29 6.99,44.45 v14.13,44.45
N$40
  Top 0.152: D1.C 16.03,31.91 18.73,31.91 18.73,31.27 C7.1 | C8.1 20.95,31.11 18.89,31.11 C7.1 | 3.49,45.56 4.45,45.56 C2.1 | 3.49,45.56 2.38,45.56 R26.1 | 3.49,45.56 3.49,48.74 3.81,49.05 6.51,49.05 6.51,52.86 6.03,53.34 1.27,53.34 1.27,37.31 2.54,36.04 IC8.1 2.54,35.88 1.11,34.45 1.11,17.14 | 1.11,17.14 1.11,8.73 1.91,7.94 U$4.P$2 | 1.11,17.14 10.48,17.14 17.62,24.29 17.62,30 18.73,31.11 C7.1
N$41  (via drill 0.38)
  Top 0.152: v24.13,46.67 23.34,45.88 23.34,45.09 22.7,44.45 v22.54,44.45
  Bottom 0.152: v24.13,46.67 23.5,46.67 23.18,46.99 T12.1 | R37.1 v22.54,44.45
N$42  (via drill 0.38)
  Top 0.152: v63.66,21.91 66.04,21.91 R21.2 | v12.38,20.48 12.38,28.1 U$2.1
  Bottom 0.152: v63.66,21.91 62.23,20.48 v12.38,20.48
N$43
  Bottom 0.152: R38.1 22.86,43.18 21.91,44.13 15.88,44.13 15.56,44.45 T15.1
N$44  (via drill 0.38)
  Top 0.152: v24.13,40.96 v24.13,39.69
  Bottom 0.152: v24.13,39.69 24.77,39.69 25.08,39.37 T14.1 | v24.13,40.96 24.13,41.91 R39.1
N$45
  Top 0.152: T5.1 115.73,40.96 117.95,40.96 117.95,47.31 118.11,47.47 119.86,47.47 119.86,45.24 119.7,45.09 119.7,43.34 119.86,43.18 119.86,39.69 123.03,36.51 123.03,36.04 IC7.4
N$46
  Bottom 0.152: R40.1 23.81,36.83 23.81,35.56 25.08,34.29 T13.1
N$47  (via drill 0.38)
  Top 0.152: v10,35.56 10,34.77 10.16,34.61 T11.1 | v7.46,35.56 6.51,35.56 6.51,35.88 IC8.4
  Bottom 0.152: v7.46,35.56 v10,35.56
N$48  (via drill 0.38)
  Top 0.152: v23.02,39.37 22.07,40.32 22.07,43.97 21.91,44.13 21.91,44.77 22.54,45.4 v22.7,45.4
  Bottom 0.152: v23.02,39.37 23.02,38.42 T14.3 | v22.7,45.4 22.38,45.09 21.59,45.09 R43.2
N$49
  Bottom 0.152: R41.2 25.08,49.53 25.08,48.1 T12.3
N$50  (via drill 0.38)
  Top 0.152: v19.21,45.09 19.05,45.24 v19.05,50.01
  Bottom 0.152: v19.21,45.09 17.94,45.09 17.62,45.4 T15.3 | v19.05,50.01 21.11,52.07 R42.2
RHVTRIG
  Top 0.152: R21.1 66.04,23.34 64.14,23.34 64.14,24.45 63.82,24.77 63.34,24.77 IC5.3
RTS+
  Bottom 0.152: K3.8 34.29,4.6 34.45,4.76 46.83,4.76 X5.1
RTS-
  Bottom 0.152: K3.5 26.67,4.6 27.62,5.56 40.96,5.56 46.83,11.43 X5.3
RVSEL  (via drill 0.38)
  Top 0.152: v56.67,32.07 55.72,32.07 IC5.25 | v24.45,31.43 23.81,32.07 23.81,33.02 24.45,33.66 IC2.11
  Bottom 0.152: v56.67,32.07 56.36,32.38 55.56,32.38 55.24,32.7 42.7,32.7 42.39,33.02 36.2,33.02 35.88,32.7 32.7,32.7 31.75,31.75 24.77,31.75 v24.45,31.43
SCL  (via drill 0.38)
  Top 0.152: v64.61,31.27 63.34,31.27 IC5.13 | v70.48,30.64 76.52,24.61 76.52,7.78 75.56,6.83 72.87,6.83 72.87,7.62 X3.2
  Bottom 0.152: v64.61,31.27 65.25,30.64 v70.48,30.64 | X2.2 52.55,7.62 53.34,6.83 71.91,6.83 72.71,7.62 X3.2
SDA  (via drill 0.38)
  Top 0.152: 70.33,13.49 70.33,12.38 73.66,9.05 X3.3 | 70.33,13.49 70.33,23.02 69.69,23.65 69.69,26.67 67.79,26.67 67.15,27.3 67.15,30.8 65.25,30.8 65.09,30.64 63.34,30.64 IC5.12 | 70.33,13.49 v66.36,9.53
  Bottom 0.152: v66.36,9.53 66.04,9.84 54.13,9.84 53.34,9.05 X2.3
SPKR  (via drill 0.38)
  Top 0.152: v86.52,33.18 93.03,39.69 93.03,53.66 95.25,55.88 R14.1 | v64.45,30 63.34,30 IC5.11
  Bottom 0.152: v86.52,33.18 83.34,30 v64.45,30
TCK  (via drill 0.38)
  Top 0.152: R32.1 102.55,50.48 104.78,48.26 104.78,45.72 C18.1 104.93,45.56 105.89,44.61 105.89,44.13 110.81,39.21 S5.2 | v35.72,30.16 32.54,33.34 32.54,65.09 6.19,65.09 3.81,62.71 3.81,60.33 4.13,60.01 4.13,58.9 3.97,58.74 3.97,58.58 3.17,58.58 2.86,58.9 2.54,58.9 TP4.TP | v51.91,30.16 52.55,29.53 52.55,26.19 53.02,25.72 53.82,25.72 | 53.82,25.72 55.56,25.72 IC5.35 | v54.45,19.53 53.82,20.16 53.82,25.72
  Bottom 0.152: v51.91,30.16 v35.72,30.16 | v54.45,19.53 95.41,19.53 110.33,34.45 110.81,34.45 110.81,39.05 S5.2
TDI  (via drill 0.38)
  Top 0.152: 56.36,20.32 55.88,20.32 C20.1 56.36,20.32 | 56.36,20.32 R34.1 | 56.36,20.32 56.36,22.38 | 56.36,22.38 56.36,24.13 55.72,24.13 IC5.37 | v1.91,60.8 2.54,61.44 TP2.TP | v55.09,22.38 56.36,22.38
  Bottom 0.152: v1.91,60.8 1.59,60.48 1.11,60.48 0.95,60.33 0.95,30.16 5.4,30.16 11.11,24.45 54.61,24.45 55.09,23.97 v55.09,22.38 52.7,22.38 S7.2
TDO  (via drill 0.38)
  Top 0.152: C21.1 34.61,19.21 34.61,17.78 28.42,17.78 26.67,19.53 R36.1 26.51,19.68 v26.51,21.27 | v1.91,62.07 2.54,62.71 TP1.TP | v54.45,23.65 55.56,23.65 IC5.38
  Bottom 0.152: v1.91,62.07 0.64,60.8 0.64,21.59 26.51,21.59 | 26.51,21.59 S8.3 44.45,24.13 53.98,24.13 v54.45,23.65 | 26.51,21.59 v26.51,21.27
TEST  (via drill 0.38)
  Top 0.152: 3.49,56.52 4.76,56.52 4.76,57.15 R20.1 | 3.49,56.52 2.54,56.52 TP6.TP | v60.96,23.65 63.18,23.65 IC5.1 | 3.49,56.52 v3.49,56.36
  Bottom 0.152: v60.96,23.65 59.53,25.08 10.95,25.08 1.27,34.77 1.27,60.17 2.22,60.17 2.86,59.53 2.86,56.36 v3.49,56.36
TMS  (via drill 0.38)
  Top 0.152: v3.49,59.21 2.54,60.17 TP3.TP | v18.1,59.21 18.41,58.9 18.41,46.04 R33.1 18.57,45.88 18.57,44.13 18.89,43.81 C19.1 19.05,43.66 20.64,42.07 20.64,40.8 S6.2 | v57.94,33.97 57.94,24.92 55.72,24.92 IC5.36
  Bottom 0.152: v18.1,59.21 v3.49,59.21 | v57.94,33.97 56.36,35.56 24.92,35.56 24.13,36.35 24.13,37.62 22.7,37.62 20.8,39.53 20.8,40.64 S6.2
VBAT  (via drill 0.38)
  Top 0.152: R45.1 57.78,13.97 57.78,11.43 R46.2 57.63,11.43 57.63,6.83 52.23,6.83 50.8,8.26 50.8,9.21 51.28,9.68 51.28,30.48 v52.23,31.43 | v54.45,29.84 54.45,30 55.56,30 IC5.28
  Bottom 0.152: v54.45,29.84 55.09,30.48 55.09,31.43 v52.23,31.43
VCC
  Top 0.152: SG1.+ 111.92,62.23 111.92,59.85 100.65,59.85 L3.1 100.49,59.69 98.42,57.63 98.42,39.21 97.95,38.73 97.95,26.99 98.27,26.67 C10.1 98.42,26.67 100.33,24.77 100.33,15.72 | 100.33,15.72 K2.12 100.33,14.61 99.38,13.65 99.38,3.02 100.33,2.06 K2.7 | 35.24,13.97 34.29,13.97 K3.12 34.29,14.76 30.16,14.76 25.88,19.05 25.88,22.86 28.57,22.86 29.05,23.34 29.05,34.29 28.89,34.45 28.89,63.98 16.83,63.98 IC3.3 | 35.24,13.97 48.42,13.97 48.74,14.29 49.69,14.29 50.01,13.97 50.01,12.22 49.21,11.43 R6.2 | 35.24,13.97 35.24,3.02 34.29,2.06 K3.7 | 100.33,15.72 84.61,15.72 84.61,14.61 76.52,6.51 71.91,6.51 71.91,8.89 X3.1
  Bottom 0.152: K3.12 34.29,14.61 45.4,14.61 50.32,9.68 50.96,9.68 51.59,9.05 X2.1 51.75,9.05 52.86,10.16 66.67,10.16 67.31,9.53 71.44,9.53 71.91,9.05 X3.1
XIN
  Top 0.152: IC5.6 63.34,26.99 66.04,26.99 Q3.2 C12.1
XOUT
  Top 0.152: Q3.1 66.04,25.72 | 66.04,25.72 66.04,26.19 63.34,26.19 IC5.5 | 66.04,25.72 C11.1
(copper drawn outside any net)
  shapes: Bottom area x1, Top area x1